# EAGLE board Qwiic_Shield_for_Teensy_Extended (EAGLE 9.6.2)
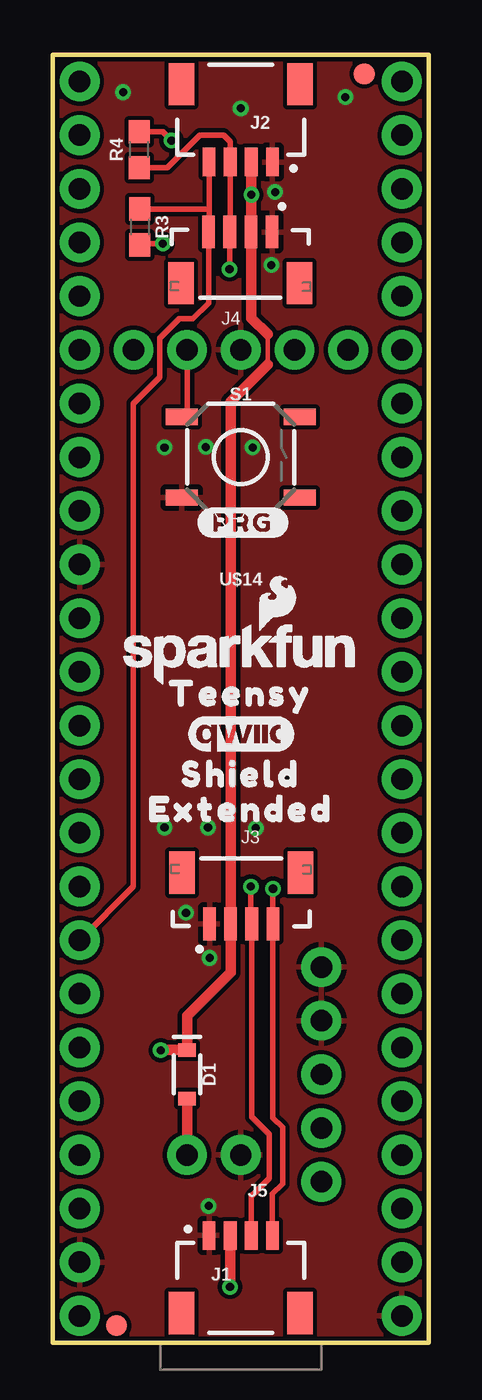
[diagram p0: board, top side]
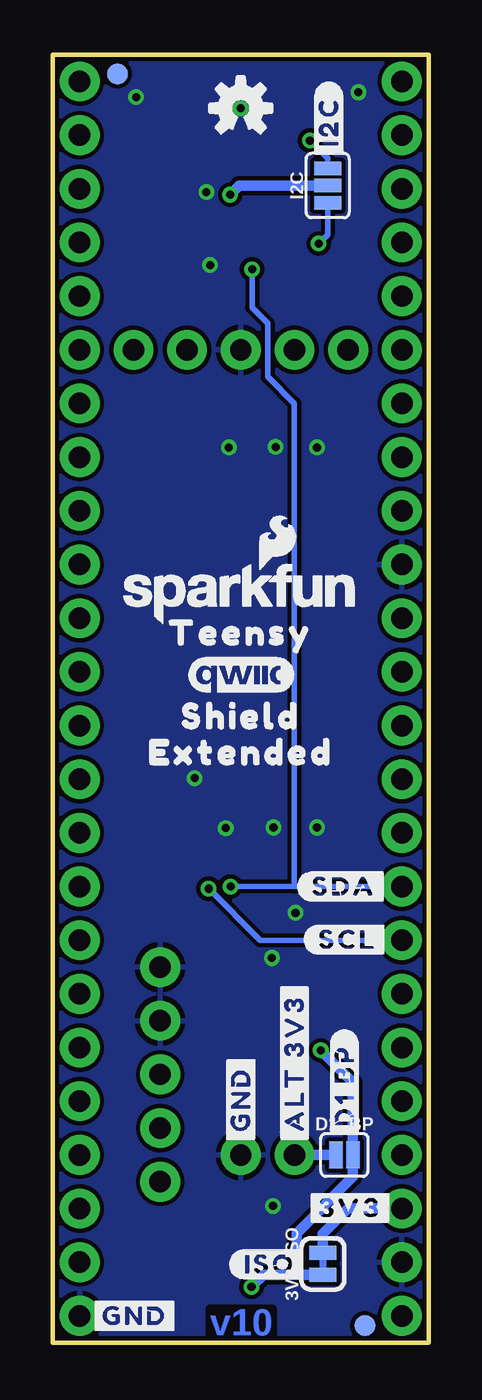
[diagram p1: board, bottom side, seen from below]

Size 17.78 x 60.96 mm. Coordinates in mm from the lower left corner, seen from the top.
Outline: 0,0 17.78,0 17.78,60.96 0,60.96 0,0
Copper layers (1*16): Top 0.035mm / dielectric 1.5mm / Bottom 0.035mm
Design rules "SparkFun-2-layer-TIGHT": minimum track width 7mil, minimum drill 15mil, track to track 7mil, track to pad 7mil, pad to pad 7mil, via to via 7mil, smd to smd 7mil, copper to edge 7mil, drill to drill 7mil, minimum pad ring 7mil, minimum via ring 7mil, stop-mask expansion 4mil, vias tented up to drill 25mil, thermal gap 10mil

## Footprints (pad centres in the part's own frame; a part is rotated, then mirrored left to right if it is on the bottom)
SMT-JUMPER_2_NC_TRACE_SILK = smd 0.66 x 1.27: 1 -0.521,0; 2 0.521,0
SOD-323 = smd 0.63 x 0.83: A 1.15,0; C -1.15,0
SMT-JUMPER_2_NO_SILK = smd 0.635 x 1.27: 1 -0.406,0; 2 0.406,0
FIDUCIAL-1X2 = smd 1 x 1: 1 0,0
SMT-JUMPER_3_NO_SILK = smd 0.635 x 1.27: 1 -0.813,0; 2 0,0; 3 0.813,0
JST04_1MM_RA = smd 0.6 x 1.35: 1 -1.5,0; 2 -0.5,0; 3 0.5,0; 4 1.5,0 | smd 1.2 x 2: NC1 2.8,-3.675; NC2 -2.8,-3.675
JST04_1MM_VERT = smd 0.6 x 1.55: 1 -1.478,0.775; 2 -0.478,0.775; 3 0.522,0.775; 4 1.522,0.775 | smd 1.2 x 2: NC1 -2.778,3.2; NC2 2.822,3.2
1X02_NO_SILK = drill 1.016 pad 1.88: 1 0,0; 2 2.54,0
0603 = smd 1.1 x 1: 1 -0.85,0; 2 0.85,0
TACTILE_SWITCH_SMD_5.2MM = smd 1.524 x 0.762: 1 -2.794,1.905; 2 2.794,1.905; 3 -2.794,-1.905; 4 2.794,-1.905
TEENSY-LONG_NO_SILK = drill 1.016 pad 1.88: 0 7.62,-13.97; 1 7.62,-11.43; 2 7.62,-8.89; 3 7.62,-6.35; 3.3V@1 7.62,19.05; 3.3V@2 2.54,29.21; 3V -7.62,-11.43; 4 7.62,-3.81; 5 7.62,-1.27; 5V 3.81,-10.16; 6 7.62,1.27; 7 7.62,3.81; 8 7.62,6.35; 9 7.62,8.89; 10 7.62,11.43; 11 7.62,13.97; 12 7.62,16.51; 13 -7.62,16.51; 14 -7.62,13.97; 15 -7.62,11.43; 16 -7.62,8.89; 17 -7.62,6.35; 18 -7.62,3.81; 19 -7.62,1.27; 20 -7.62,-1.27; 21 -7.62,-3.81; 22 -7.62,-6.35; 23 -7.62,-8.89; 24 7.62,21.59; 25 7.62,24.13; 26 7.62,26.67; 27 7.62,29.21; 28 7.62,31.75; 29 7.62,34.29; 30 7.62,36.83; 31 7.62,39.37; 32 7.62,41.91; 33 -7.62,41.91; 34 -7.62,39.37; 35 -7.62,36.83; 36 -7.62,34.29; 37 -7.62,31.75; 38 -7.62,29.21; 39 -7.62,26.67; 40 -7.62,24.13; 41 -7.62,21.59; AGND -7.62,-13.97; D+ 3.81,-5.08; D- 3.81,-7.62; GND 0,29.21; GND1 7.62,-16.51; GND2 -7.62,19.05; GND3 3.81,-2.54; GND4 3.81,0; PROG -2.54,29.21; R -5.08,29.21; VBAT 5.08,29.21; VIN -7.62,-16.51

## Placement (x,y rotation side)
3V3_ISO  [SMT-JUMPER_2_NC_TRACE_SILK]  5,3.73 90 bottom
D1  3A/10V/280mV  [SOD-323]  6.35,12.7 270 top
D1_BP  [SMT-JUMPER_2_NO_SILK]  3.99,8.89 0 bottom
FD1  FIDUCIAL1X2  [FIDUCIAL-1X2]  3.02,0.81 0 top
FD2  FIDUCIAL1X2  [FIDUCIAL-1X2]  3.02,0.81 0 bottom
FD3  FIDUCIAL1X2  [FIDUCIAL-1X2]  14.73,60.05 0 top
FD4  FIDUCIAL1X2  [FIDUCIAL-1X2]  14.73,60.05 0 bottom
FRAME1  FRAME-LETTER  [CREATIVE_COMMONS]  -12.7,-12.7 0 top  (outside the outline)
I2C  JUMPER-SMT_3_NO_SILK  [SMT-JUMPER_3_NO_SILK]  4.78,54.76 90 bottom
J1  QWIIC_RA  [JST04_1MM_RA]  8.89,5.08 0 top
J2  QWIIC_RA  [JST04_1MM_RA]  8.89,55.88 180 top
J3  QWIIC_Vertical  [JST04_1MM_VERT]  8.89,19.05 0 top
J4  QWIIC_Vertical  [JST04_1MM_VERT]  8.89,53.34 180 top
J5  ALT PWR  [1X02_NO_SILK]  8.89,8.89 180 top
LOGO1  SFE_LOGO_NAME_FLAME.1_INCH  [SFE_LOGO_NAME_FLAME_.1]  8.89,35.46 0 bottom
LOGO2  SFE_LOGO_NAME_FLAME.1_INCH  [SFE_LOGO_NAME_FLAME_.1]  8.89,32.59 0 top
LOGO3  OSHW-LOGOS  [OSHW-LOGO-S]  8.89,58.42 0 bottom
LOGO4  QWIIC_LOGO_5MM  [QWIIC_5MM]  8.89,28.83 0 top
LOGO5  QWIIC_LOGO_5MM  [QWIIC_5MM]  8.89,31.62 0 bottom
R3  4.7k  [0603]  4.11,52.81 270 top
R4  4.7k  [0603]  4.09,56.46 90 top
S1  [TACTILE_SWITCH_SMD_5.2MM]  8.89,41.91 0 top
U$1  [#I2C#0]  4.72,55.91 90 bottom
U$2  [TEENSY0]  8.89,33.6 0 bottom
U$3  [3V36]  0,0 0 top
U$4  [#D1_BP#0]  3.99,9.53 90 bottom
U$5  [#ALT_3V3#0]  6.35,13.23 90 bottom
U$6  [#PRG#0]  8.99,38.81 0 top
U$7  [#GND#0]  8.89,11.51 90 bottom
U$8  [SHIELD0]  8.89,26.9 0 top
U$9  [#GND#0]  13.92,1.27 0 bottom
U$10  [#ISO#0]  7.52,3.71 0 bottom
U$11  [EXTENDED0]  8.89,25.25 0 top
U$12  [SHIELD0]  8.89,29.64 0 bottom
U$13  [TEENSY0]  8.89,30.73 0 top
U$14  TEENSY-LONGNO_SILK  [TEENSY-LONG_NO_SILK]  8.89,17.78 0 top
U$15  [#3V3#0]  5.92,6.38 0 bottom
U$16  [EXTENDED0]  8.89,27.94 0 bottom
U$18  [#SDA#0]  1.78,21.59 0 bottom
U$19  [#SCL#0]  1.75,19.08 0 bottom

## Library data of the parts
3V3_ISO D1_BP I2C = SparkFun-Jumpers
D1 = SparkFun-DiscreteSemi; PROD_ID: DIO-14072
FD1-FD4 FRAME1 LOGO1-LOGO5 = SparkFun-Aesthetics
J1 J2 = SparkFun-Connectors; PROD_ID: CONN-13694
J3 J4 = SparkFun-Connectors; PROD_ID: CONN-14483
J5 = SparkFun-Connectors
R3 R4 = SparkFun-Resistors; PROD_ID: RES-07857
S1 = SparkFun-Switches; PROD_ID: SWCH-14139
U$1 U$2 U$4-U$13 U$15 U$16 U$18 U$19 = output
U$3 = buzzard_labels (24)
U$14 = teensy_boards

## Nets
3.3V: 3V3_ISO.1 D1.C D1_BP.2 I2C.2 J1.2 J2.2 J3.2 J4.2
3.3V_1: U$14.3.3V@1
3.3V_2: U$14.3.3V@2
5V: U$14.5V
D+: U$14.D+
D-: U$14.D-
GND: J1.1 J2.1 J3.1 J4.1 J5.1 S1.3 U$14.AGND U$14.GND U$14.GND1 U$14.GND2 U$14.GND3 U$14.GND4
N$1: I2C.3 R4.2
N$2: I2C.1 R3.2
N$3: 3V3_ISO.2 U$14.3V
N$4: D1.A D1_BP.1 J5.2
N$5: S1.1 U$14.PROG
SCL: J1.4 J2.4 J3.4 J4.4 R3.1 U$14.19
SDA: J1.3 J2.3 J3.3 J4.3 R4.1 U$14.18
VBAT: U$14.VBAT
VIN: U$14.VIN

## Tracks (layer width: path | path; a pad name or v marks a point on that pad's centre or on a via)
3.3V  (via drill 0.38)
  Top 0.203: 10.16,46.28 10.16,47.73
  Top 0.508: J2.2 v9.39,54.33 9.39,52.59 | 9.39,52.59 J4.2 | v5.11,13.84 v5.11,13.85 D1.C 6.35,15.47 8.41,17.53 J3.2 8.41,44.53 10.16,46.28 | 9.39,52.59 9.39,48.5 10.16,47.73 | J1.2 v8.39,2.65 v8.38,2.64
  Bottom 0.508: 3V3_ISO.1 6.25,3.21 | 6.25,3.21 7.81,3.21 v8.38,2.64 | 6.25,3.21 6.25,5.18 3.58,7.85 D1_BP.2 3.58,12.32 v5.11,13.84 | I2C.2 8.96,54.76 v9.39,54.33
GND  (via drill 0.38)
  other vias: 7.37,6.48 7.42,18.21 10.34,51 10.52,54.46 6.3,20.35 11.07,26.72 7.34,24.38 5.28,24.38 9.6,24.36 5.28,42.37 7.24,42.39 9.45,42.37 13.84,58.95 8.89,58.42 3.33,59.18
  pour Top (isolate 0.203): 0,0 17.78,0 17.78,60.96 0,60.96
  pour Bottom (isolate 0.203): 17.78,0 0,0 0,60.96 17.78,60.96
N$1  (via drill 0.38)
  Top 0.254: v5.61,56.9 5.2,57.31 R4.2
  Bottom 0.254: I2C.3 4.78,56.06 v5.61,56.9
N$2  (via drill 0.38)
  Top 0.254: v5.21,52.02 4.18,52.02 R3.2
  Bottom 0.254: I2C.1 4.78,52.45 v5.21,52.02
N$3
  Bottom 0.508: 3V3_ISO.2 5,5.16 3.81,6.35 U$14.3V
N$4
  Top 0.508: J5.2 D1.A
  Bottom 0.508: J5.2 D1_BP.1
N$5
  Top 0.254: U$14.PROG 6.35,44.07 S1.1
SCL  (via drill 0.38)
  Top 0.254: J2.4 7.39,53.65 | 7.39,53.65 7.39,52.59 J4.4 7.37,49.2 6.63,48.46 5.97,48.46 5.05,47.55 5.05,45.7 3.81,44.45 3.81,21.59 U$14.19 | R3.1 7.38,53.66 7.39,53.65 | J1.4 10.39,7.04 10.87,7.52 10.87,10.19 10.41,10.64 J3.4 v10.41,21.49
  Bottom 0.254: U$14.19 7.98,19.05 v10.41,21.49
SDA  (via drill 0.38)
  Top 0.254: R4.1 5.42,55.61 6.96,57.15 8.08,57.15 8.39,56.84 J2.3 8.39,52.59 J4.3 v8.37,50.81 v8.36,50.8 | J1.3 9.39,6.93 10.24,7.77 10.24,9.86 9.41,10.68 J3.3 9.37,19.86 v9.37,21.59
  Bottom 0.254: U$14.18 6.35,21.59 | 6.35,21.59 v9.37,21.59 | v8.36,50.8 8.36,49 7.62,48.26 7.62,45.72 6.35,44.45 6.35,21.59

## Text on the board
Bottom: v10
tDocu: Pete Lewis